# Altium PCB djb_v2_flex.PcbDoc
Units mm, origin at the board's own origin, x right, y up, seen from the top; angles counter-clockwise.
Board outline 34.63 x 7.15 mm, 2 copper layers (Top Layer, Bottom Layer), stack 0.051 mm thick; 5 components, 8 nets, 25 pads, 0 vias.
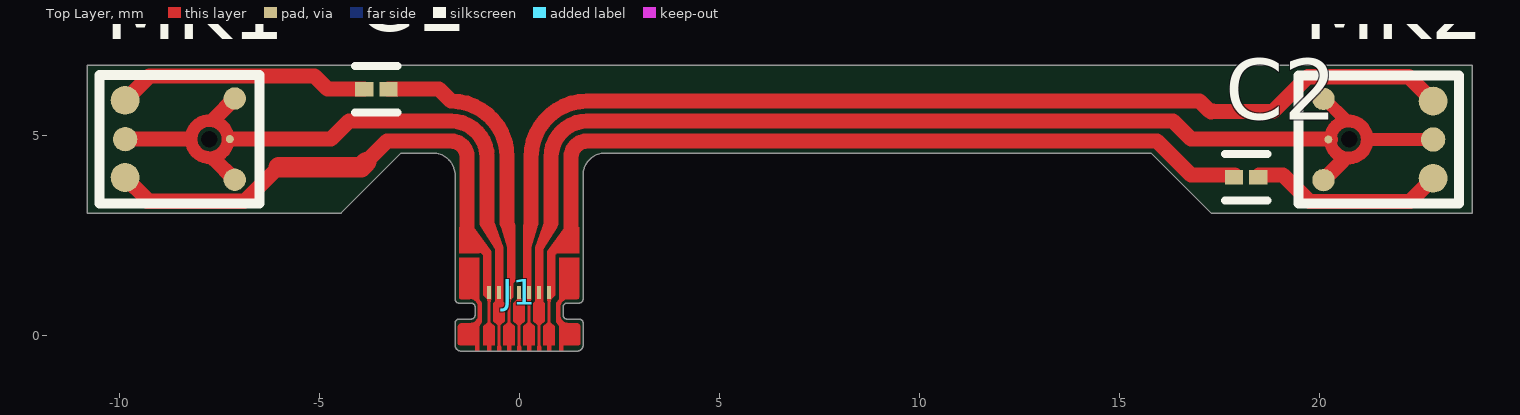
[diagram p0: Top Layer view]
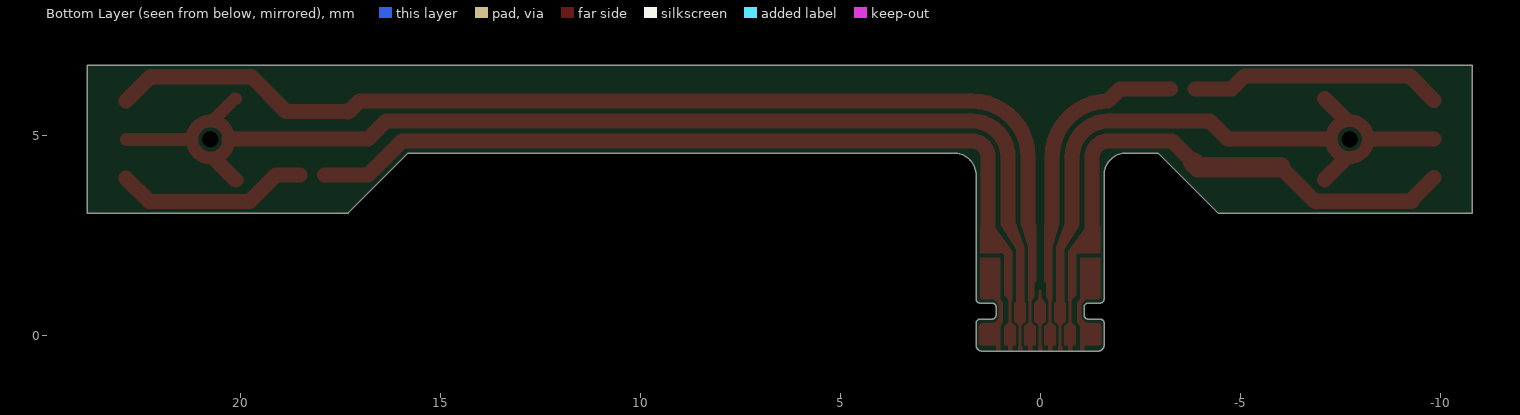
[diagram p1: Bottom Layer view, seen from below]
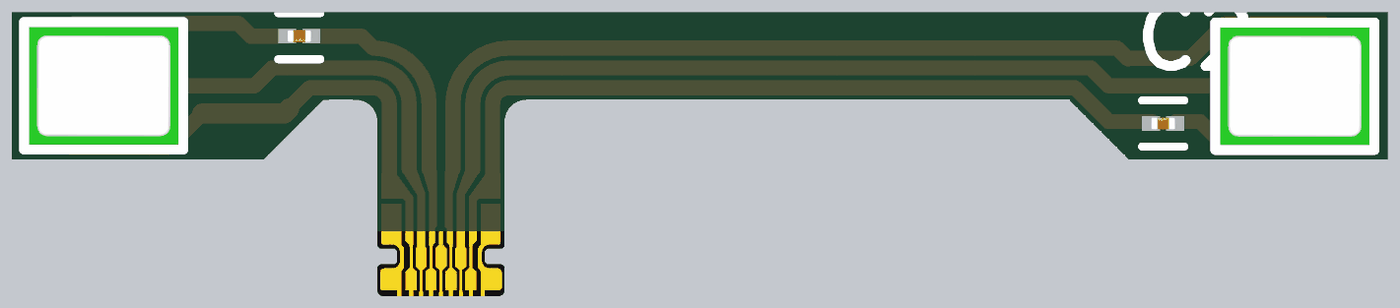
[diagram p2: 3D render of the assembled board from above, using the file's embedded part models]

## Layer stack, top to bottom
Top Solder: solder mask 0.012, Solder Resist, Dk 3.4
Top Layer: signal copper 0.0203
Dielectric 1: dielectric 0.0102, Polysomething, Dk 3.4
Bottom Layer: signal copper 0.0203
Bottom Solder: solder mask 0.012, Solder Resist, Dk 3.4

## Board outline
-1.6,-0.25 -1.6,0.3 cw(c-1.5,0.3) -1.5,0.4 -1.2,0.4 ccw(c-1.2,0.5) -1.1,0.5 -1.1,0.7 ccw(c-1.2,0.7) -1.2,0.8 -1.5,0.8 cw(c-1.5,0.9) -1.6,0.9 -1.6,4 ccw(c-2.15,4) -2.15,4.55 -2.95,4.55 -4.45,3.05 -10.8,3.05 -10.8,6.75 23.825,6.75 23.825,3.05 17.3,3.05 15.8,4.55 2.15,4.55 ccw(c2.15,4) 1.6,4 1.6,0.9 cw(c1.5,0.9) 1.5,0.8 1.2,0.8 ccw(c1.2,0.7) 1.1,0.7 1.1,0.5 ccw(c1.2,0.5) 1.2,0.4 1.5,0.4 cw(c1.5,0.3) 1.6,0.3 1.6,-0.25 cw(c1.45,-0.25) 1.45,-0.4 -1.45,-0.4 cw(c-1.45,-0.25)

## Design rules (kind name [scope] priority, off if disabled: settings)
BoardOutlineClearance BoardOutlineClearance_Silk [OnLayer('Top Overlay') Or OnLayer('Bottom Overlay')] p1: gap=0 ignorepadtopadclearanceinfootprint=FALSE
BoardOutlineClearance BoardOutlineClearance_FFC [InComponent('J1')] p2: gap=0 ignorepadtopadclearanceinfootprint=FALSE
BoardOutlineClearance BoardOutlineClearance_Normal [All] p3: gap=0.099 ignorepadtopadclearanceinfootprint=FALSE except(0: Arc-SplitBarrior Arc-SplitContinuation Track-SplitBarrior Track-SplitContinuation SMDPad-SplitBarrior SMDPad-SplitContinuation THPad-SplitBarrior THPad-SplitContinuation Via-SplitBarrior Via-SplitContinuation Fill-SplitBarrior Fill-SplitContinuation Poly-SplitBarrior Poly-SplitContinuation Region-SplitBarrior Region-SplitContinuation Text-SplitBarrior Text-SplitContinuation)
Clearance Clearance_SameNet [All] p1: gap=0.07 ignorepadtopadclearanceinfootprint=FALSE except(-1000: Arc-Via Track-Via SMDPad-Via THPad-Via Via-Via)
Clearance [All] p2: gap=0.07 ignorepadtopadclearanceinfootprint=FALSE
ComponentClearance [All] p1: gap=0 collisioncheckmode=3 verticalgap=0 showdistances=FALSE
DiffPairsRouting [All] p1: maxlimit=0.254 minlimit=0.254 mostfreqgap=0.254 toplayer_minwidth=0.381 toplayer_maxwidth=0.381 toplayer_prefwidth=0.381 bottomlayer_minwidth=0.381 bottomlayer_maxwidth=0.381 bottomlayer_prefwidth=0.381 substack1={420E78C4-8536-47EC-A85E-D20D25995AD5} toplayer_{420e78c4-8536-47ec-a85e-d20d25995ad5}_minwidth=0.381 toplayer_{420e78c4-8536-47ec-a85e-d20d25995ad5}_maxwidth=0.381 toplayer_{420e78c4-8536-47ec-a85e-d20d25995ad5}_prefwidth=0.381 bottomlayer_{420e78c4-8536-47ec-a85e-d20d25995ad5}_minwidth=0.381 bottomlayer_{420e78c4-8536-47ec-a85e-d20d25995ad5}_maxwidth=0.381 bottomlayer_{420e78c4-8536-47ec-a85e-d20d25995ad5}_prefwidth=0.381 maxuncoupledlength=12.7
MinimumSolderMaskSliver [All] p1: minsoldermaskwidth=0.076
PolygonConnect [All] p1: connectstyle=Relief reliefconductorwidth=0.254 reliefentries=4 polygonreliefangle="90 Angle" airgapwidth=0.254
RoomDefinition flexPCB [InComponentClass('flexPCB')] p1: confinementstyle=ConfineIn formatcopy=TRUE lockcomponents=FALSE outline 23.65,1 42,1 42,8.15 23.65,8.15
RoutingVias [All] p1: holewidth=0.152 width=0.305 viastyle="Through Hole" minholewidth=0.152 minwidth=0.305 maxholewidth=2.032 maxwidth=2.54
SilkToSilkClearance [All] p1: silktosilkclearance=-25.4
SilkToSolderMaskClearance [IsPad] p1: minsilkscreentomaskgap=-25.4 clearancetoexposedcopper=TRUE
SolderMaskExpansion [All] p1: expansion=0.076 istentingtop=FALSE
ViasUnderSMD [All] p1: allowed=FALSE
Width [All] p1: maxlimit=2.54 minlimit=0.07 preferedwidth=0.152 substack1={420E78C4-8536-47EC-A85E-D20D25995AD5} minimp=50.000000 maximp=50.000000 favimp=50.000000
25 further rules are at their usual default settings.

## Components (designator, comment, footprint, x,y, rotation, side; value= is the part's Value field where it differs from the comment)
C1 "GRM033R60J155ME14D" FP-GRM033-0_03-IPC_B -3.566,6.15 r0 top
C2 "GRM033R60J155ME14D" FP-GRM033-0_03-IPC_B 18.175,3.95 r180 top
J1 "FFC EDGE BOTTOM" HIROSE_FH58M-7S-0.25SHW-99_BOTTOMFFC 0,-0.4 r180 top locked
MK1 "AMM-3738-B-R" 665-AMM-3738-B-R -7.74,4.9 r270 top
MK2 "AMM-3738-B-R" 665-AMM-3738-B-R 20.74,4.89 r90 top

## Footprints (in the part's own frame and the unit in brackets; to place one, negate y for a bottom-side part, rotate by r counter-clockwise, add the part's x,y. Pads: shape width x height; smd on the part's side, far side on the other; paste and mask are expansions set on the pad)
665-AMM-3738-B-R [mm] "Analog MEMS Microphone"
  round 0.72 smd: 1(-0.97,-2.11) 4(0.96,-2.11)
  round 0.56 smd: 2(-1.015,0.63)
  round 0.56 smd mask+0.102: 3(1.015,0.63)
  round 0.61 smd: 5(0,-2.11)
  round 0.2 smd: 6(0,0.508)
  Top Layer lines w0.315: 0.05,-0.46 cw(c0,0) -0.45,0.107 cw(c0,0) 0,0.463 cw(c0,0) 0.45,0.107 cw(c0,0) 0.05,-0.46
  silkscreen extent -1.61,-2.76 1.61,1.25, body extent -1.48,-2.63 1.47,1.13, height 1.11
FP-GRM033-0_03-IPC_B [mm]
  rect 0.454x0.363 smd paste+0 mask+0: 1(-0.304,0) 2(0.304,0)
  silkscreen extent -0.53,-0.58 0.53,0.58, body extent -0.68,-0.33 0.68,0.33, height 0.25
HIROSE_FH58M-7S-0.25SHW-99_BOTTOMFFC [mm] "Hirose FH58M-7S-0.25SHW(99) FFC Pattern for Bottom Contacts"
  rect 0.1x0.33 smd paste-1000 mask-1000: 1(-0.75,-1.465) 2(-0.5,-1.465) 3(-0.25,-1.465) 4(0,-1.465) 5(0.25,-1.465) 6(0.5,-1.465) 7(0.75,-1.465)
  Top Layer region: -1,0 -1.1,0 -1.1,-0.15 -1.48,-0.15 -1.499,-0.154 -1.515,-0.165 -1.526,-0.181 -1.53,-0.2 -1.53,-0.2 -1.53,-0.6 -1.522,-0.638 -1.501,-0.671 -1.468,-0.692 -1.43,-0.7 -1.43,-0.7 -1.23,-0.7 -1.153,-0.715 -1.089,-0.759 -1.045,-0.823 -1.03,-0.9 -1.03,-0.9 -1.03,-1.1 -1.045,-1.177 -1.089,-1.241 -1.153,-1.285 -1.23,-1.3 -1.23,-1.3 -1.45,-1.3 -1.469,-1.304 -1.485,-1.315 -1.496,-1.331 -1.5,-1.35 -1.5,-1.35 -1.5,-2.33 -1,-2.33 -1,-1.3 -0.93,-1.21 -0.93,-0.72 -1,-0.62
  Top Layer region: 1,0 1.1,0 1.1,-0.15 1.48,-0.15 1.499,-0.154 1.515,-0.165 1.526,-0.181 1.53,-0.2 1.53,-0.2 1.53,-0.6 1.522,-0.638 1.501,-0.671 1.468,-0.692 1.43,-0.7 1.43,-0.7 1.23,-0.7 1.153,-0.715 1.089,-0.759 1.045,-0.823 1.03,-0.9 1.03,-0.9 1.03,-1.1 1.045,-1.177 1.089,-1.241 1.153,-1.285 1.23,-1.3 1.23,-1.3 1.45,-1.3 1.469,-1.304 1.485,-1.315 1.496,-1.331 1.5,-1.35 1.5,-1.35 1.5,-2.33 1,-2.33 1,-1.3 0.93,-1.21 0.93,-0.72 1,-0.62
  Top Layer region: 0.47,-0.65 0.36,-0.75 0.36,-1.2 0.45,-1.3 0.45,-1.32 0.55,-1.32 0.55,-1.3 0.64,-1.2 0.64,-0.75 0.53,-0.65
  Top Layer region: -0.03,-0.65 -0.14,-0.75 -0.14,-1.2 -0.05,-1.3 -0.05,-1.32 0.05,-1.32 0.05,-1.3 0.14,-1.2 0.14,-0.75 0.03,-0.65
  Top Layer region: 0.61,-0.15 0.61,-0.62 0.72,-0.72 0.78,-0.72 0.89,-0.62 0.89,-0.15 0.8,-0.15 0.8,0 0.7,0 0.7,-0.15
  Top Layer region: 0.11,-0.15 0.11,-0.62 0.22,-0.72 0.28,-0.72 0.39,-0.62 0.39,-0.15 0.3,-0.15 0.3,0 0.2,0 0.2,-0.15
  Top Layer region: -0.39,-0.15 -0.39,-0.62 -0.28,-0.72 -0.22,-0.72 -0.11,-0.62 -0.11,-0.15 -0.2,-0.15 -0.2,0 -0.3,0 -0.3,-0.15
  Top Layer region: -0.89,-0.15 -0.89,-0.62 -0.78,-0.72 -0.72,-0.72 -0.61,-0.62 -0.61,-0.15 -0.7,-0.15 -0.7,0 -0.8,0 -0.8,-0.15
  Top Layer region: -0.53,-0.65 -0.64,-0.75 -0.64,-1.2 -0.55,-1.3 -0.55,-1.32 -0.45,-1.32 -0.45,-1.3 -0.36,-1.2 -0.36,-0.75 -0.47,-0.65
  Top Layer region: -0.3,-1.31 -0.3,-1.3 -0.28,-1.2 -0.22,-1.2 -0.2,-1.3 -0.2,-1.31
  Top Layer region: 0.2,-1.31 0.2,-1.3 0.22,-1.2 0.28,-1.2 0.3,-1.3 0.3,-1.31
  Top Layer region: 0.7,-1.31 0.7,-1.3 0.72,-1.2 0.78,-1.2 0.8,-1.3 0.8,-1.31
  Top Layer region: -0.8,-1.31 -0.8,-1.3 -0.78,-1.2 -0.72,-1.2 -0.7,-1.3 -0.7,-1.31
  Top Layer region: -0.55,0 -0.55,-0.1 -0.53,-0.16 -0.47,-0.16 -0.45,-0.1 -0.45,0
  Top Layer region: -0.05,0 -0.05,-0.1 -0.03,-0.16 0.03,-0.16 0.05,-0.1 0.05,0
  Top Layer region: 0.45,0 0.45,-0.1 0.47,-0.16 0.53,-0.16 0.55,-0.1 0.55,0
  Top Layer lines w0.07: 0.75,-0.1 0.75,-1.465 0.75,-1.5 ; 0.5,-0.1 0.5,-1.465 0.5,-1.5 ; 0.25,-0.1 0.25,-1.465 0.25,-1.5 ; 0,-0.1 0,-1.5 ; -0.25,-0.1 -0.25,-1.465 -0.25,-1.5 ; -0.5,-0.1 -0.5,-1.465 -0.5,-1.5 ; -0.75,-0.1 -0.75,-1.465 -0.75,-1.5
  body extent -1.6,-2.63 1.6,0, height 0.02

## Part data
C1 C2: library part CMP-06035-017352-1, "Chip Multilayer Ceramic Capacitors for General Purpose, 0201, 1.5uF, X5R, 15%, 20%, 6.3V", Capacitance=1.5uF, Case Code (Imperial)=0201, Case Code (Metric)=0603, Dielectric=X5R, Max Operating Temperature=85°C, Min Operating Temperature=-55°C, Tolerance=20%, Voltage Rating=6.3V, Case/Package=0201, Length=0.024inch, Mount="Surface Mount", Packaging="Tape and Reel", Thickness=0.013inch, Voltage Rating (DC)=6.3V, Width=0.012inch
J1: library part HIROSE_FH58M-7S-0.25SHW-99_BOTTOM, "Bottom FFC Land Pattern for Hirose FH58M-7S-0.25SHW(99) 7-pin Top+Bottom Contact FFC Connector"
MK1 MK2: Manufacturer="PUI Audio", Supplier Part Number 1=665-AMM-3738-B-R, Supplier 1=Mouser

## Free pads (board coordinates)
  round 0 hole 0.411 unplated: 2(-7.742,4.9) 2(20.75,4.9)

## Nets (pads, with @x,y where several pads share a name; then routed paths per layer and width w, separated by ;. In a path a pad name is that pad's centre, name@x,y a point inside that pad or via, vN(x,y) a via of type N, cw(c..) or ccw(c..) an arc to the next point about the centre after c; other vN are vias at no path point)
+MEMS1: J1.7 MK1.4 | length 11.6
  Top Layer w0.152: -6.986,3.345 -6.981,3.35 -6.881,3.35 -6.858,3.35
  Top Layer w0.381: MK1.4 -9.296,3.386 ; -9.296,3.345 -6.986,3.345 -6.886,3.345 ; -6.858,3.35 -6.008,4.2 ; -3.736,4.415 -3.3,4.85 -1.7,4.85 cw(c-1.7,4.45) -1.3,4.45 -1.3,2.5
  Top Layer w0.508: -6.008,4.2 -3.95,4.2 -3.823,4.327
+MEMS2: J1.3 MK2.4 | length 25.8
  Top Layer w0.381: 0.3,2.8 0.3,4.45 cw(c1.7,4.45) 1.7,5.85 17.01,5.85 17.26,5.6 17.28,5.6 ; 17.31,5.6 17.28,5.6 ; 17.35,5.6 17.28,5.6 ; MK2.4 22.239,6.461 19.721,6.461 18.85,5.59 17.31,5.59 17.3,5.58 ccw(c17.28,5.58) 17.28,5.6
GND1: J1.6 MK1.2 MK1.3 MK1.5 MK1.6 | length 12
  Top Layer w0.152: -8.25,4.9 -8.2,4.85 ; -7.633,4.408 -7.633,4.45 ; -7.633,5.35 -7.633,5.392
  Top Layer w0.381: MK1.5 -8.25,4.9 ; -7.633,4.408 MK1.3 ; -7.633,5.392 MK1.2 ; MK1.6 -4.7,4.9 -4.25,5.35 -1.7,5.35 cw(c-1.7,4.45) -0.8,4.45 -0.8,2.8
GND2: J1.2 MK2.2 MK2.3 MK2.5 MK2.6 | length 25.2
  Top Layer w0.152: MK2.2 MK2.2@20.11,3.963 ; 20.597,4.362 20.597,4.45
  Top Layer w0.315: MK2.3 20.137,5.905 20.692,5.35 ; 21.203,4.89 MK2.5
  Top Layer w0.381: 0.8,2.8 0.8,4.45 cw(c1.7,4.45) 1.7,5.35 16.35,5.35 16.8,4.9 20.267,4.9 MK2.6@20.277,4.89 ; MK2.2 20.597,4.362
MIC1: C1.2 J1.5 | length 5.5
  Top Layer w0.381: C1.2 -2,6.15 -1.7,5.85 cw(c-1.7,4.45) -0.3,4.45 -0.3,2.8
MIC2: C2.2 J1.1 | length 19.1
  Top Layer w0.381: 1.3,2.5 1.3,4.45 cw(c1.7,4.45) 1.7,4.85 15.95,4.85 16.8,4 C2.2@17.891,4
NetC1_1: C1.1 MK1.1 | length 6.4
  Top Layer w0.381: MK1.1 -9.245,6.475 -5.114,6.475 -4.789,6.15 C1.1
NetC2_1: C2.1 MK2.1 | length 4.9
  Top Layer w0.37: 19.761,3.339 20.277,3.339
  Top Layer w0.381: C2.1@18.5,4 19.1,4 19.761,3.339 ; 20.277,3.339 22.269,3.339 MK2.1
pads on no net: J1.4

## Other copper
Top Layer:
  region net MIC2: 0.9,1 0.9,1.95 cw(c0.983,1.967) 1,2.05 1.5,2.05 1.5,2.7 1.136,2.7 0.7,2.1 0.7,0.9 0.8,0.9
  region net +MEMS1: -0.9,1 -0.9,1.95 ccw(c-0.983,1.967) -1,2.05 -1.5,2.05 -1.5,2.7 -1.136,2.7 -0.7,2.1 -0.7,1.2 -0.7,0.9 -0.8,0.9
  region net GND2: 0.6,0.45 0.6,2.15 0.95,2.7 0.95,2.9 0.65,2.9 0.4,2.2 0.4,0.45
  region net +MEMS2: 0.3,0.9 0.3,1.2 0.3,2.2 0.45,2.7 0.45,2.902 0.15,2.902 0.1,2.75 0.1,1.35 0.15,1.3 0.15,0.95 0.2,0.9
  region net MIC1: -0.3,0.9 -0.3,2.2 -0.45,2.7 -0.45,2.902 -0.15,2.902 -0.1,2.75 -0.1,1.35 -0.15,1.3 -0.15,0.95 -0.2,0.9
  region net GND1: -0.6,0.45 -0.6,2.15 -0.95,2.7 -0.95,2.9 -0.65,2.9 -0.4,2.2 -0.4,0.45

## Silkscreen, mask and mechanical layers (free items; w line width, h text height)
Mechanical 3:
  lines w0.076: -10.8,3.05 -10.8,6.75 23.825,6.75 23.825,3.05 17.3,3.05 15.8,4.55 2.15,4.55 ccw(c2.15,4) 1.6,4 1.6,2.23 1.6,0.9 cw(c1.5,0.9) 1.5,0.8 1.2,0.8 ccw(c1.2,0.7) 1.1,0.7 1.1,0.5 ccw(c1.2,0.5) 1.2,0.4 1.5,0.4 cw(c1.5,0.3) 1.6,0.3 1.6,-0.25 cw(c1.45,-0.25) 1.45,-0.4 -1.45,-0.4 cw(c-1.45,-0.25) -1.6,-0.25 -1.6,0.3 cw(c-1.5,0.3) -1.5,0.4 -1.2,0.4 ccw(c-1.2,0.5) -1.1,0.5 -1.1,0.7 ccw(c-1.2,0.7) -1.2,0.8 -1.5,0.8 cw(c-1.5,0.9) -1.6,0.9 -1.6,2.25 -1.6,4 ccw(c-2.15,4) -2.15,4.55 -2.95,4.55 -4.45,3.05 -10.8,3.05
Mechanical 5:
  lines w0.076: -1.6,-0.25 ccw(c-1.45,-0.25) -1.45,-0.4 1.45,-0.4 ccw(c1.45,-0.25) 1.6,-0.25 1.6,0.3 ccw(c1.5,0.3) 1.5,0.4 1.2,0.4 cw(c1.2,0.5) 1.1,0.5 1.1,0.7 cw(c1.2,0.7) 1.2,0.8 1.5,0.8 ccw(c1.5,0.9) 1.6,0.9 1.6,2.23 -1.6,2.23 -1.6,0.9 ccw(c-1.5,0.9) -1.5,0.8 -1.2,0.8 cw(c-1.2,0.7) -1.1,0.7 -1.1,0.5 cw(c-1.2,0.5) -1.2,0.4 -1.5,0.4 ccw(c-1.5,0.3) -1.6,0.3 -1.6,-0.25